# Altium PCB Tesis-C_elegans.PcbDoc
Units mm, origin at the board's own origin, x right, y up, seen from the top; angles counter-clockwise.
Board outline 45 x 35 mm, 2 copper layers (Top Layer, Bottom Layer); 23 components, 14 nets, 62 pads, 12 vias.
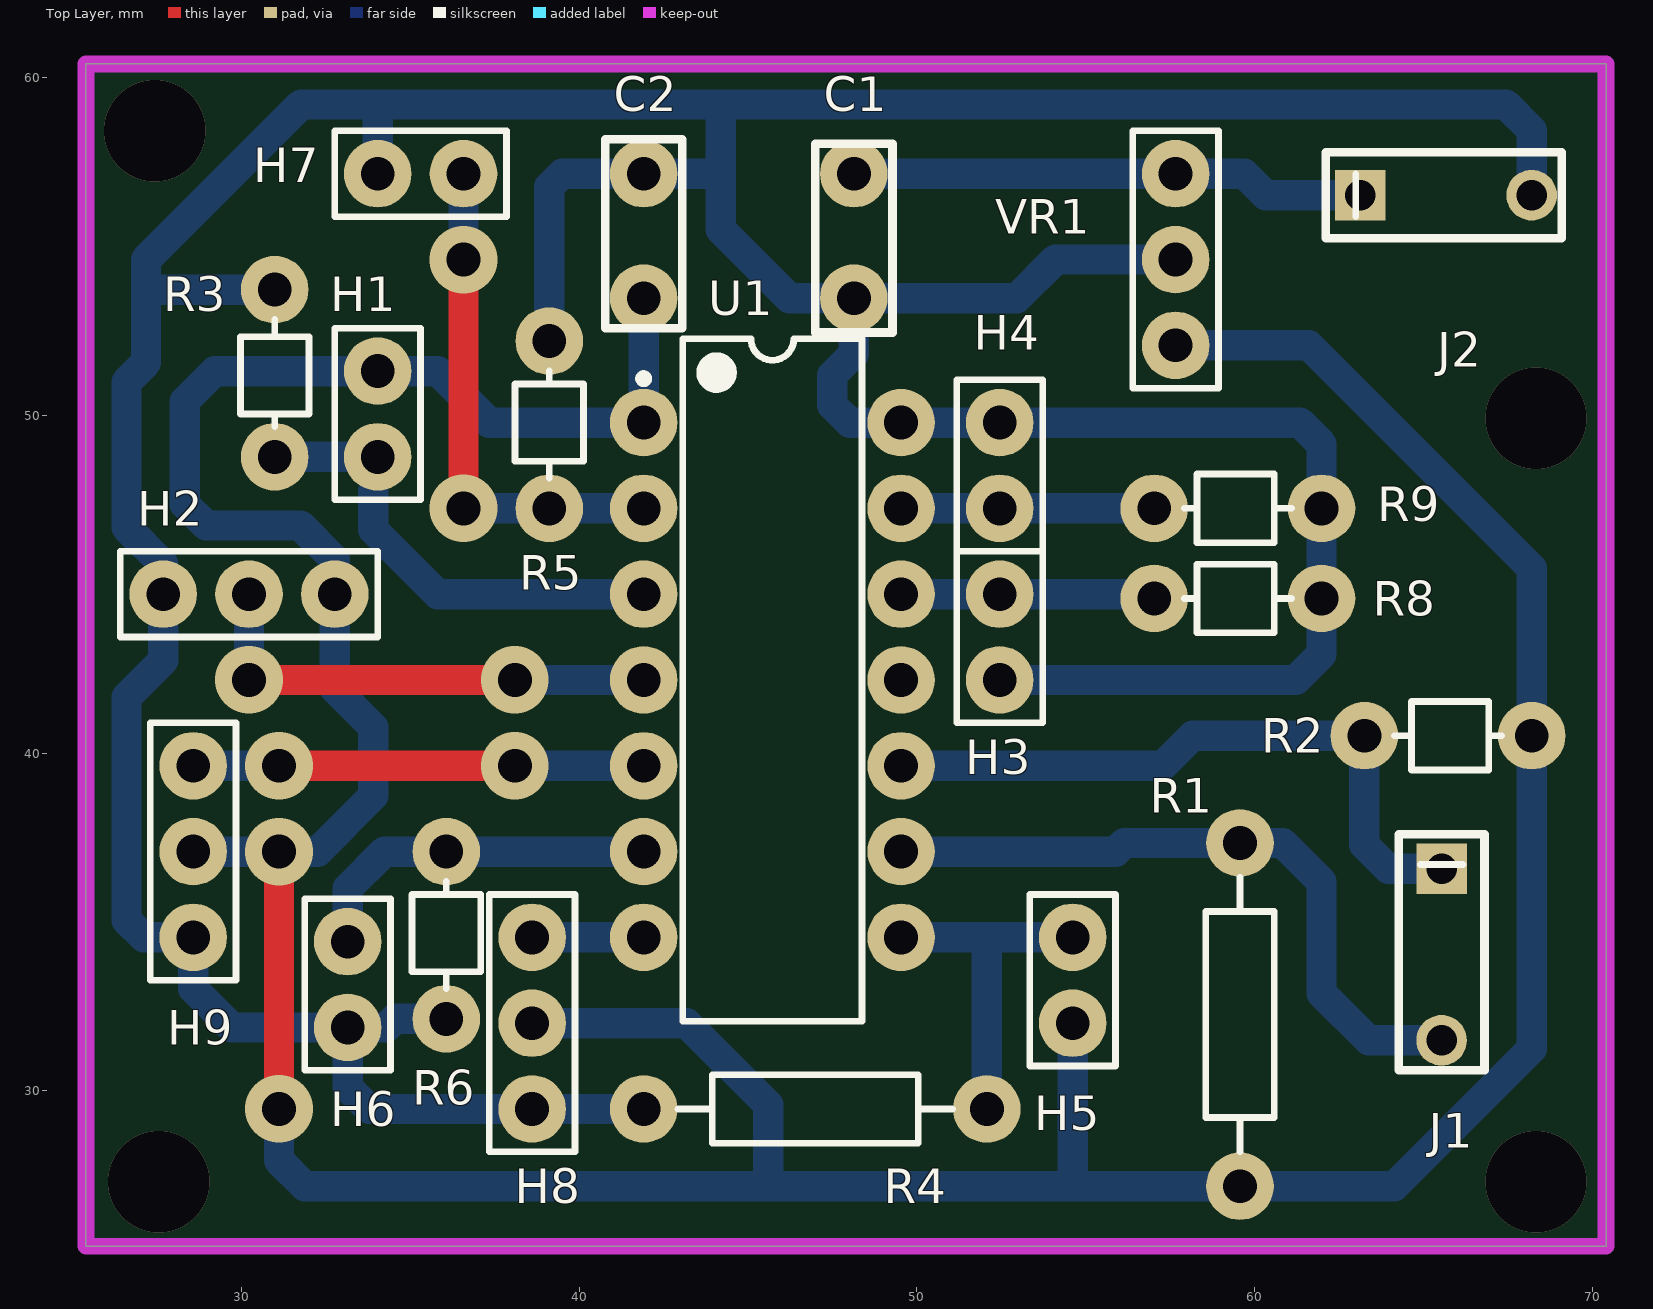
[diagram p0: Top Layer view]
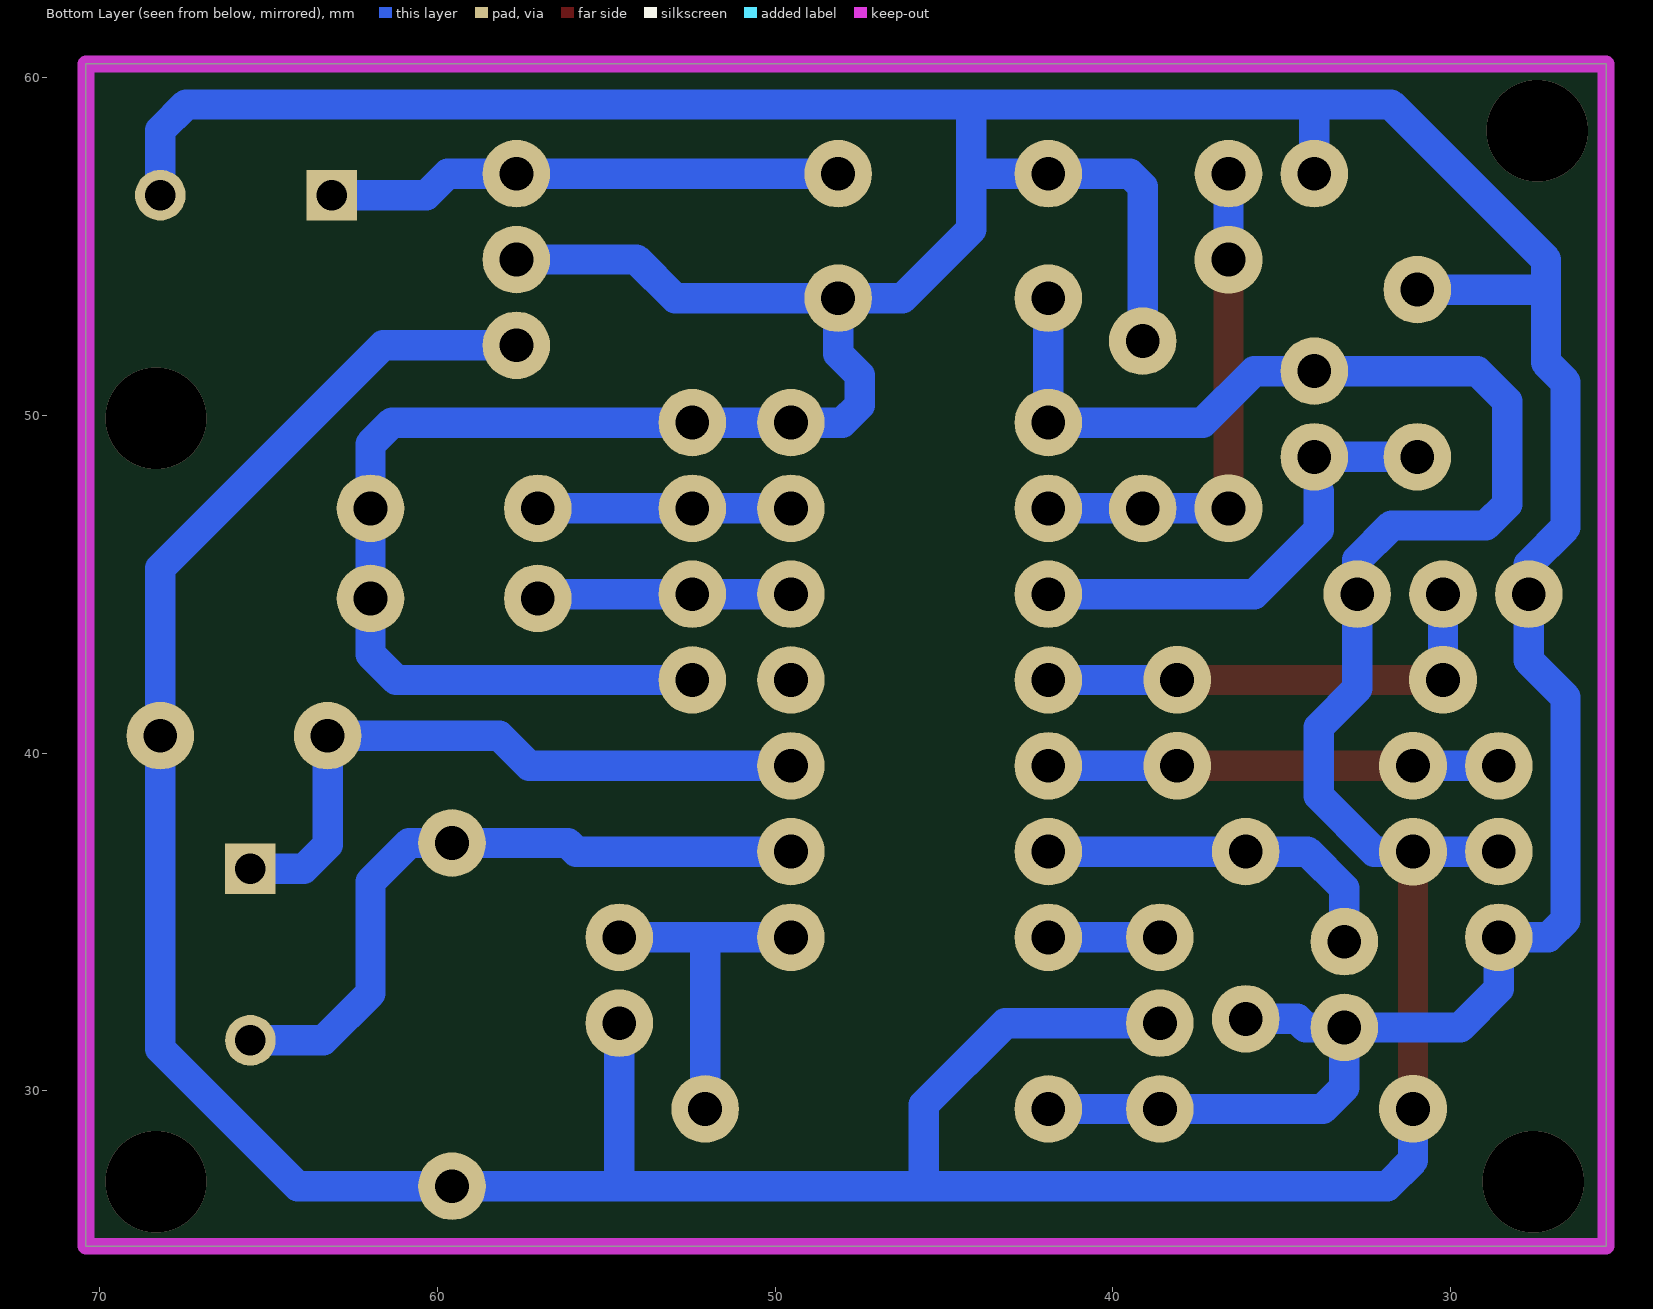
[diagram p1: Bottom Layer view, seen from below]
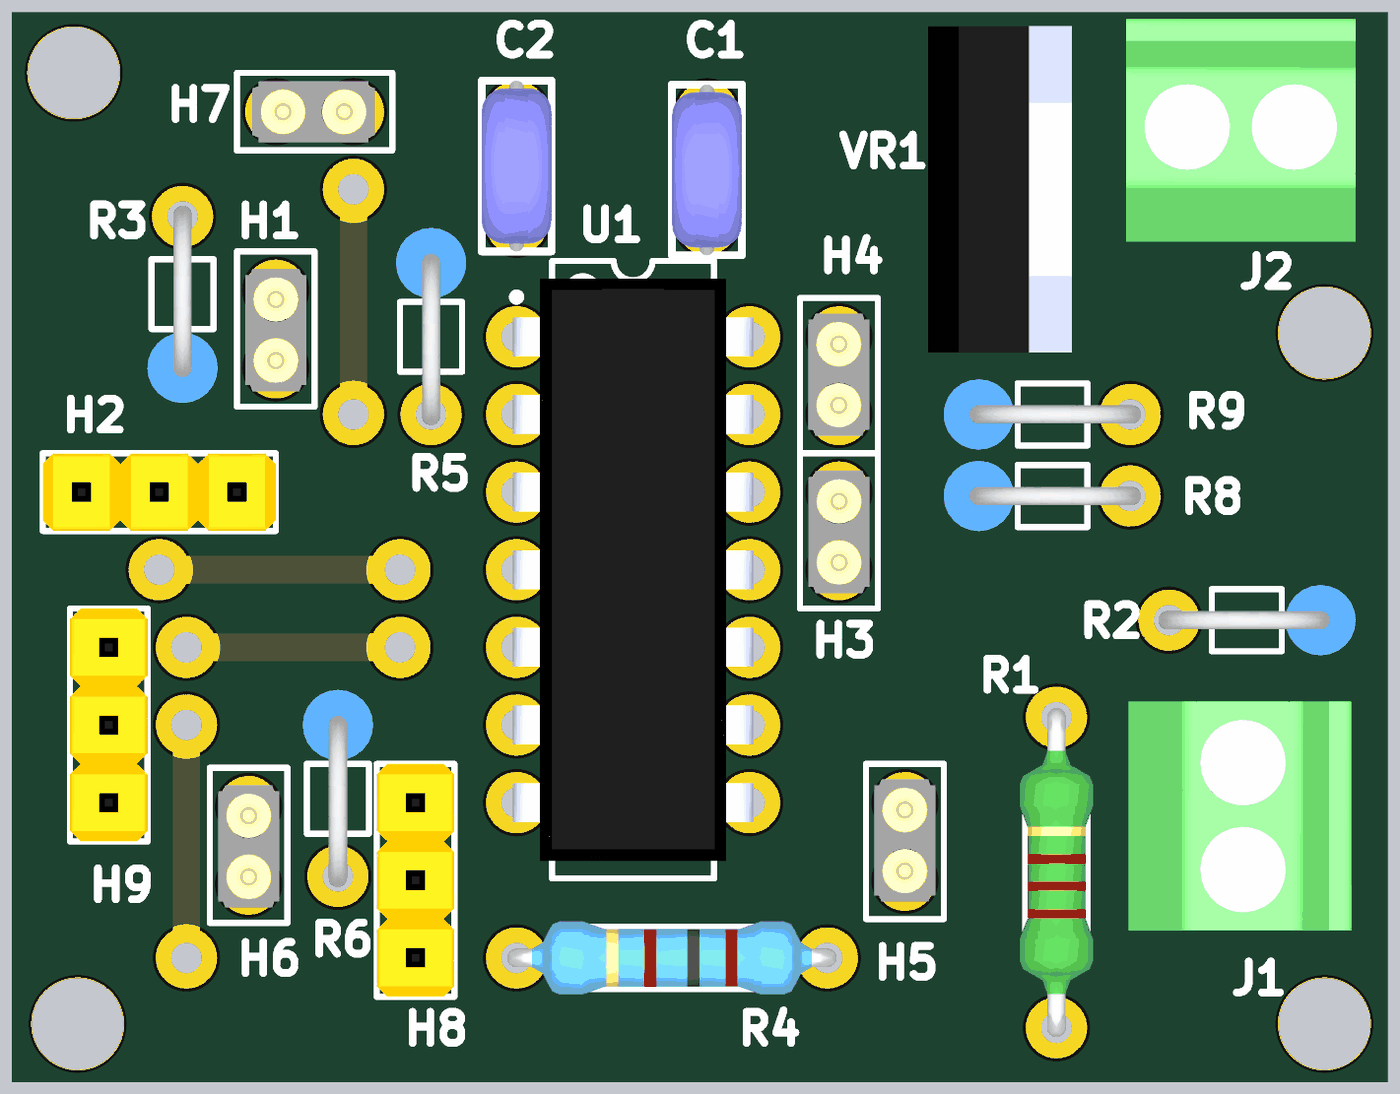
[diagram p2: 3D render of the assembled board from above, using the file's embedded part models]

## Layer stack, top to bottom
Top Solder: solder mask 0.0102, Solder Resist, Dk 3.5
Top Layer: signal copper 0.0356
Dielectric 1: dielectric 0.32, FR-4, Dk 4.8
Bottom Layer: signal copper 0.0356
Bottom Solder: solder mask 0.0102, Solder Resist, Dk 3.5

## Board outline
25.4,25.4 25.4,60.4 70.4,60.4 70.4,25.4

## Design rules (kind name [scope] priority, off if disabled: settings)
Clearance [All] p1: gap=0.5
PolygonConnect [All] p1: connectstyle=Relief reliefconductorwidth=0.254 reliefentries=4 polygonreliefangle="90 Angle" airgapwidth=0.254
RoutingVias [All] p1: holewidth=1 width=2 viastyle="Through Hole" minholewidth=1 minwidth=2 maxholewidth=1 maxwidth=2
SolderMaskExpansion [All] p1: expansion=0.102
Width [All] p1: maxlimit=2 minlimit=0.8 preferedwidth=0.9
30 further rules are at their usual default settings.

## Components (designator, comment, footprint, x,y, rotation, side; value= is the part's Value field where it differs from the comment)
C1 "" "ceramic capacitor" 48.133,55.245 r90 top
C2 "" "ceramic capacitor" 41.91,55.372 r270 top
H1 "LDR" HDR1X2-HEADER 34.036,51.308 r270 top
H2 "LM35" HDR1X3-header 32.766,44.704 r180 top
H3 "7BB-12-9" HDR1X2-HEADER 52.451,44.704 r270 top
H4 "7BB-12-9" HDR1X2-HEADER 52.451,47.244 r90 top
H5 "LDR" HDR1X2-HEADER 54.61,32.004 r90 top
H6 "7BB-12-9" HDR1X2-HEADER 33.147,34.417 r270 top
H7 "7BB-12-9" HDR1X2-HEADER 36.576,57.15 r180 top
H8 "Servo" HDR1X3-header 38.608,34.544 r270 top
H9 "Servo" HDR1X3-header 28.575,39.624 r270 top
J1 "I2C" "HDR1X2-3d - duplicate" 65.532,35.433 r270 top
J2 "Alim" "HDR1X2-3d - duplicate" 64.262,56.515 r0 top
R1 "" "AXIAL-0.4 -2.2K" 59.563,32.258 r270 top
R2 "" AXIAL-0.4-10M-Folded 68.199,40.513 r0 top
R3 "" AXIAL-0.4-10M-Folded 30.988,48.768 r270 top
R4 "" "AXIAL-0.4 -1K" 46.99,29.464 r0 top
R5 "" AXIAL-0.4-10M-Folded 39.116,52.197 r90 top
R6 "" AXIAL-0.4-10M-Folded 36.068,37.084 r90 top
R8 "" AXIAL-0.4-10M-Folded 57.023,44.577 r180 top
R9 "" AXIAL-0.4-10M-Folded 57.023,47.244 r180 top
U1 "PIC16F1455-I/P" DIP-14 45.72,42.164 r0 top
VR1 "LM7805" LM7805 57.658,57.15 r270 top

## Footprints (in the part's own frame and the unit in brackets; to place one, negate y for a bottom-side part, rotate by r counter-clockwise, add the part's x,y. Pads: shape width x height; smd on the part's side, far side on the other; paste and mask are expansions set on the pad)
"AXIAL-0.4 -1K" [mm] "Axial Device, Thru-Hole; 2 Leads; 0.4 in Pin Spacing"
  round 2 hole 1: 1(-5.08,0) 2(5.08,0)
  silkscreen extent -4.06,-1.02 4.06,1.02, body extent -5.38,-1.2 5.38,1.2, height 2.41
"AXIAL-0.4 -2.2K" [mm] "Axial Device, Thru-Hole; 2 Leads; 0.4 in Pin Spacing"
  round 2 hole 1: 1(-5.08,0) 2(5.08,0)
  silkscreen extent -4.06,-1.02 4.06,1.02, body extent -5.38,-1.2 5.38,1.2, height 2.41
AXIAL-0.4-10M-Folded [mm] "Axial Device, Thru-Hole; 2 Leads; 0.4 in Pin Spacing"
  round 2 hole 1: 1(-4.953,0) 2(0,0)
  silkscreen extent -4.06,-1.02 -0.89,1.02, body extent -5.3,-1.15 1.15,1.15, height 10.7
"ceramic capacitor" [mm] "Polarized Capacitor (Radial); 2 Leads"
  round 2 hole 1: 1(1.905,0) 2(-1.778,0)
  body extent -2.79,-1.14 2.79,1.14, height 6.54
DIP-14 [mm] "DIP; 14 Leads; Row Spacing 7.62 mm; Pitch 2.54 mm"
  round 2 hole 1: 1(-3.81,7.62) 2(-3.81,5.08) 3(-3.81,2.54) 4(-3.81,0) 5(-3.81,-2.54) 6(-3.81,-5.08) 7(-3.81,-7.62) 8(3.81,-7.62) 9(3.81,-5.08) 10(3.81,-2.54) 11(3.81,0) 12(3.81,2.54) 13(3.81,5.08) 14(3.81,7.62)
  silkscreen extent -3.93,-10.1 2.65,10.1, body extent -3.94,-9.52 3.94,9.53, height 4.19
"HDR1X2-3d - duplicate" [mm] "Connector; Header; 2 Position"
  rect 1.5x1.5 hole 0.9: 1(-1.143,0)
  round 1.5 hole 0.9: 2(3.937,0)
  silkscreen extent -2.16,-1.27 4.83,1.27, body extent -2.42,-3.62 5.08,3.68, height 8.5
HDR1X2-HEADER [mm] "Connector; Header; 2 Position"
  round 2 hole 1: 1(0,0) 2(2.54,0)
  silkscreen extent -1.27,-1.27 3.81,1.27, body extent -0.7,-1 3.3,1, height 3.91
HDR1X3-header [mm] "Connector; Header; 3 Position"
  round 2 hole 1: 1(0,0) 2(2.54,0) 3(5.08,0)
  silkscreen extent -1.27,-1.27 6.35,1.27, body extent -1.27,-1.27 6.35,1.27, height 9.5
LM7805 [mm] "Connector; Header; 3 Position"
  round 2 hole 1: 1(0,0) 2(2.54,0) 3(5.08,0)
  silkscreen extent -1.27,-1.27 6.35,1.27, body extent -2.79,-2.29 7.88,2.41, height 17.12

## Part data
C1 C2: library part "Cap Pol1", "Polarized Capacitor (Radial)"
H1 H3 H4 H5 H6 H7 J1 J2: library part "Header 2", "Header, 2-Pin"
H2 H8 H9: library part "Header 3", "Header, 3-Pin"
R1 R2 R3 R4 R5 R6 R8 R9: library part Res2, "Resistor"
U1: "8-Bit Flash USB Microcontroller with XLP Technology, 48 MHz, 11 I/O, -40 to 85 degC, 14-pin PDIP (P14), Tube"
VR1: library part "Volt Reg"

## Via types
v1: diameter 2, hole 1, Top Layer to Bottom Layer, 8 vias
v2: diameter 3, hole 3, Top Layer to Bottom Layer, 4 vias

## Nets (pads, with @x,y where several pads share a name; then routed paths per layer and width w, separated by ;. In a path a pad name is that pad's centre, name@x,y a point inside that pad or via, vN(x,y) a via of type N, cw(c..) or ccw(c..) an arc to the next point about the centre after c; other vN are vias at no path point)
5V: C2.1 H1.1 H2.1 H5.1 H8.2 H9.2 R1.2 R2.2 U1.1 VR1.3 | length 130.6
  Top Layer w0.9: v1(31.115,29.464) v1(31.115,37.084)
  Bottom Layer w0.9: H9.2 v1(31.115,37.084) 32.258,37.084 33.909,38.735 33.909,40.767 32.766,41.91 H2.1@32.766,44.45 ; v1(31.115,29.464) 31.115,27.94 31.877,27.178 45.593,27.178 ; H2.1 32.766,45.72 31.75,46.736 28.956,46.736 28.321,47.371 28.321,50.419 29.21,51.308 H1.1 35.814,51.308 37.338,49.784 U1.1 C2.1 ; H8.2 43.18,32.004 45.593,29.591 45.593,27.178 ; H5.1 54.61,27.178 ; VR1.3 61.595,52.07 68.199,45.466 R2.2 68.199,31.242 64.135,27.178 54.61,27.178 ; 45.593,27.178 54.61,27.178
12V: C1.1 J2.1 VR1.1 | length 15.2
  Bottom Layer w0.9: C1.1 VR1.1 59.69,57.15 60.325,56.515 J2.1
GND: C1.2 C2.2 H2.3 H3.2 H4.2 H6.2 H7.2 H8.3 H9.3 J2.2 R3.1 R4.1 R5.2 R6.1 R8.1 R9.1 U1.14 VR1.2 | length 157.2
  Bottom Layer w0.9: R3.1 27.432,53.721 27.178,53.975 ; H7.2 34.036,59.2 ; R6.1 34.544,32.131 34.29,31.877 H6.2 ; R5.2 39.116,56.769 39.497,57.15 C2.2 44.069,57.15 ; R4.1 H8.3 33.782,29.464 33.147,30.099 H6.2 ; H3.2@52.578,42.291 H3.2 61.214,42.164 61.976,42.926 R8.1 R9.1 61.976,49.149 61.341,49.784 H4.2 U1.14 48.006,49.784 47.498,50.292 47.498,51.181 48.133,51.816 C1.2 ; VR1.2 54.102,54.61 52.959,53.467 C1.2 ; J2.2 68.199,58.438 67.437,59.2 44.196,59.2 ; 27.178,53.975 27.178,54.61 31.768,59.2 34.036,59.2 ; 27.178,53.975 27.178,51.562 26.6,50.984 26.6,46.679 27.686,45.593 H2.3 27.686,42.742 26.6,41.656 26.6,35.052 27.108,34.544 H9.3 28.575,33.02 29.718,31.877 H6.2 ; 34.036,59.2 44.196,59.2 ; 44.196,59.2 44.196,55.499 46.228,53.467 C1.2
NetH1_2: H1.2 R3.2 U1.3 | length 13
  Bottom Layer w0.9: R3.2 H1.2 ; 33.909,47.752 33.909,46.609 35.814,44.704 U1.3
NetH2_2: H2.2 U1.4 | length 14.2
  Top Layer w0.9: v1(30.226,42.164) v1(38.1,42.164)
  Bottom Layer w0.9: v1(30.226,42.164) H2.2 ; v1(38.1,42.164) U1.4
NetH3_1: H3.1 R8.2 U1.12 | length 7.5
  Bottom Layer w0.9: U1.12 H3.1 56.896,44.704 R8.2
NetH4_1: H4.1 R9.2 U1.13 | length 7.5
  Bottom Layer w0.9: U1.13 H4.1 R9.2
NetH5_2: H5.2 R4.2 U1.8 | length 10.2
  Bottom Layer w0.9: U1.8 52.07,34.544 ; R4.2 52.07,34.544 ; H5.2 52.07,34.544
NetH6_1: H6.1 R6.2 U1.6 | length 11.2
  Bottom Layer w0.9: H6.1 33.147,35.993 34.238,37.084 R6.2 U1.6 ; R6.2@35.814,36.957 R6.2@36.195,36.957
NetH7_1: H7.1 R5.1 U1.2 | length 15.2
  Top Layer w0.9: v1(36.576,47.244) v1(36.576,54.61)
  Bottom Layer w0.9: v1(36.576,47.244) R5.1 U1.2 ; v1(36.576,54.61) H7.1
NetH8_1: H8.1 U1.7 | length 3.3
  Bottom Layer w0.9: H8.1 U1.7
NetH9_1: H9.1 U1.5 | length 13.3
  Top Layer w0.9: v1(31.115,39.624) v1(38.1,39.624)
  Bottom Layer w0.9: H9.1 v1(31.115,39.624) ; v1(38.1,39.624) U1.5
NetJ1_1: J1.1 R2.1 U1.10 | length 19.9
  Bottom Layer w0.9: U1.10 57.277,39.624 58.166,40.513 R2.1 63.246,37.286 63.956,36.576 J1.1
NetJ1_2: J1.2 R1.1 U1.9 | length 20.5
  Bottom Layer w0.9: U1.9 55.88,37.084 56.134,37.338 R1.1 60.833,37.338 61.976,36.195 61.976,32.893 63.373,31.496 J1.2
pads on no net: U1.11
copper on no net:
  other v2: 27.559,27.305 68.326,27.305 68.326,49.911 27.432,58.42

## Keep-outs
Keep-Out Layer:
  the board outline again, w0.5

## Other copper
Bottom Layer:
  pour cut-out: 37.993,33.294 38.759,33.294 38.784,33.269 38.784,33.089 38.025,32.33 37.993,32.362

## Silkscreen, mask and mechanical layers (free items; w line width, h text height)
Top Overlay:
  lines w0.254: 40.767,52.578 43.053,52.578 43.053,58.166 40.767,58.166 40.767,52.578 ; 46.99,52.451 49.276,52.451 49.276,58.039 46.99,58.039 46.99,52.451